# Altium PCB usb_plug.PCBDOC
Units mil, origin at the board's own origin, x right, y up, seen from the top; angles counter-clockwise.
Board outline 1930 x 850 mil, 2 copper layers (Top Layer, Bottom Layer); 13 components, 15 nets, 59 pads, 0 vias.
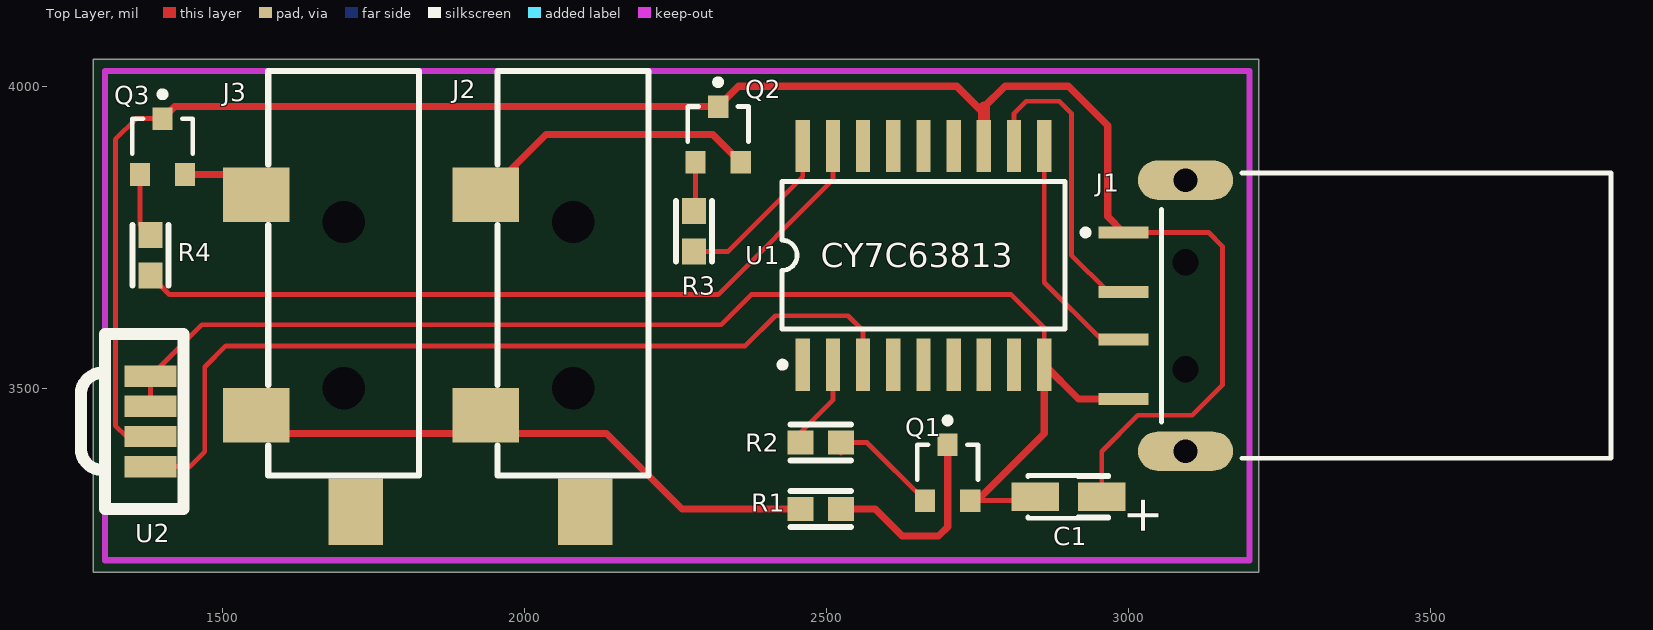
[diagram p0: Top Layer view]
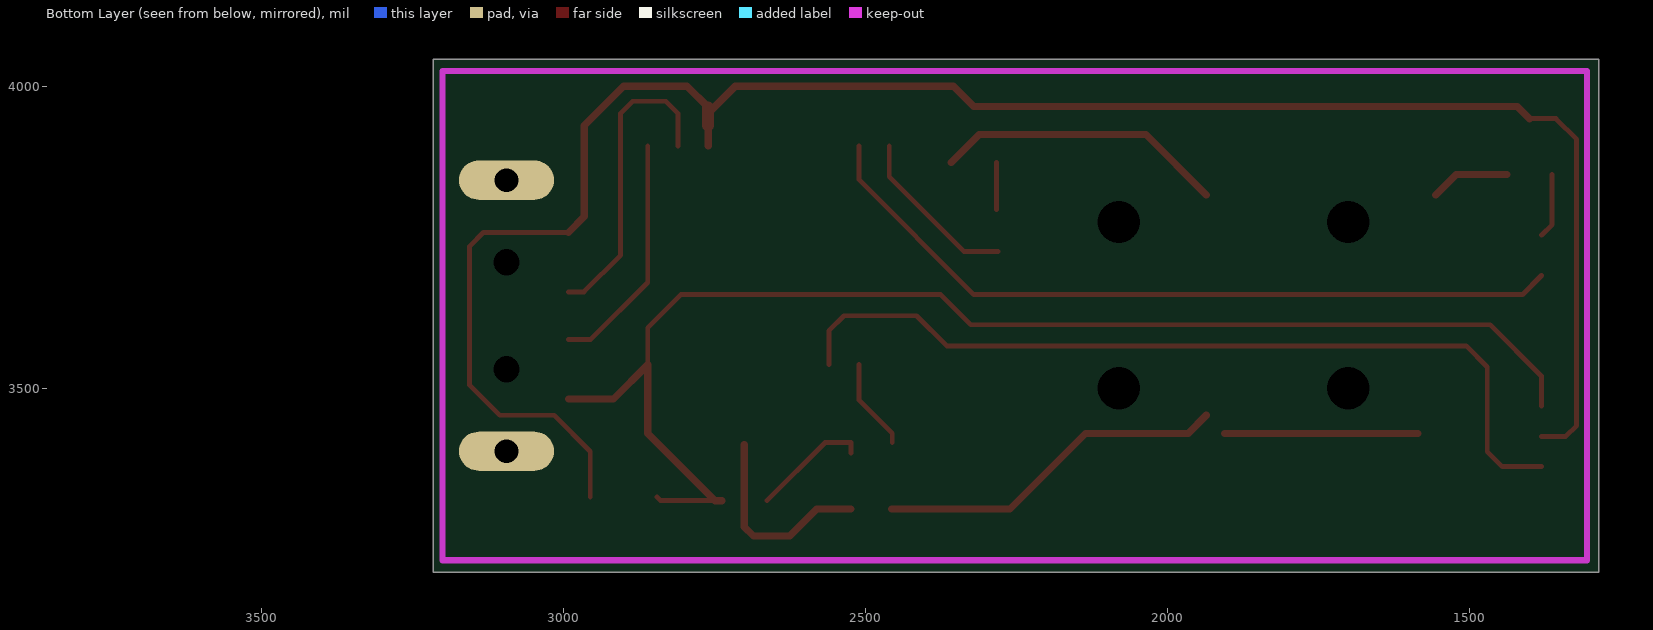
[diagram p1: Bottom Layer view, seen from below]

## Layer stack, top to bottom
Top Layer: signal copper 1.4
Dielectric: dielectric 12.6, FR-4, Dk 4.8
Bottom Layer: signal copper 1.4

## Board outline
1290,4045 3215,4045 3215,3195 1285,3195 1285,4045

## Design rules (kind name [scope] priority, off if disabled: settings)
Clearance [All] p1: gap=8
ComponentClearance [All] p1: gap=10 collisioncheckmode=2 verticalgap=10
PolygonConnect [All] p1: connectstyle=Relief reliefconductorwidth=10 reliefentries=4 polygonreliefangle="90 Angle"
RoomDefinition usb_plug [InComponentClass('usb_plug')] p1 off: confinementstyle=ConfineIn formatcopy=TRUE lockcomponents=FALSE outline 0,0 2000,0 2000,1000 0,1000
RoutingVias [All] p1: holewidth=25 width=40 viastyle="Through Hole" minholewidth=28 minwidth=50 maxholewidth=28 maxwidth=50
SolderMaskExpansion [All] p1: expansion=4
TestPointUsage [All] p1: valid=0 allowmultiple=FALSE
Testpoint [All] p1: side=15 testpointundercomponent=TRUE minsize=40 maxsize=100 preferedsize=60 minholesize=0 maxholesize=40 preferedholesize=32 testpointgrid=1 style=1023 order=0-112345678
Width [All] p1: maxlimit=20 minlimit=8 preferedwidth=8
17 further rules are at their usual default settings.

## Components (designator, comment, footprint, x,y, rotation, side; value= is the part's Value field where it differs from the comment)
C1 "Cap Pol1" TC3216-1206 2900,3320 r180 top
J1 "1-1470168-1" 1470695 3200,3620 r0 top
J2 "3.5mm phono plug" "CUI MJ-3523-SMT" 2080,3500 r90 top
J3 "3.5mm phono plug" "CUI MJ-3523-SMT" 1700,3500 r90 top
Q1 "NPN" SO-G3/D4.1 2700,3360 r0 top
Q2 "NPN" SO-G3/D4.1 2320,3920 r0 top
Q3 "NPN" SO-G3/D4.1 1400,3900 r0 top
R1 "50ohm" CR1608-0603 2490,3300 r180 top
R2 "Res2" CR1608-0603 2490,3410 r0 top
R3 "Res2" CR1608-0603 2280,3760 r90 top
R4 "Res2" CR1608-0603 1380,3720 r90 top
U1 "CY7C63813-SXC" SO-G18/E6.2 2660,3720 r0 top
U2 "TSOP362XX" "TSOP 362XX" 1380,3520 r270 top

## Footprints (in the part's own frame and the unit in brackets; to place one, negate y for a bottom-side part, rotate by r counter-clockwise, add the part's x,y. Pads: shape width x height; smd on the part's side, far side on the other; paste and mask are expansions set on the pad)
1470695 [mm] "Connector; USB1.1, Type A, SM; 4 Position; Right Angle"
  rect 2.1x0.5 smd: 1(-5.3,3.5) 2(-5.3,1) 3(-5.3,-1) 4(-5.3,-3.5)
  oval 4x1.65 hole 1: 5(-2.7,-5.7) 6(-2.7,5.7)
  round 0.8 hole 1.1 unplated: MH1(-2.7,-2.25) MH2(-2.7,2.25)
  silkscreen extent -7.02,-6 15.2,6
CR1608-0603 [mm] "Chip Resistor; Body 1.6 x 0.8 mm (LxW typ)"
  rect 1.1x1 smd: 1(-0.85,0) 2(0.85,0)
"CUI MJ-3523-SMT" [mil] "CUI 3.5mm phono jack, surface mount"
  round 20 hole 70 unplated: 0(0,0) 0(275,0)
  rect 90x110 smd: 1(320,145) 2(-45,145)
  rect 110x90 smd: 3(-205,-20)
  silkscreen extent -145,-125 525,125
SO-G3/D4.1 [mm] "SOT-23; 3 Leads; Body 3.0 x 2.5 mm, inc. leads (LxW max), Alternate Lead Configuration"
  rect 0.85x0.95 smd: 1(0,1.175) 2(-0.95,-1.175) 3(0.95,-1.175)
  silkscreen extent -1.27,-0.3 1.28,2.32
SO-G18/E6.2 [mm] "Small Outline; 18 Leads; Body Width 7.5 mm; Pitch 1.27 mm"
  rect 0.6x2.2 smd: 1(-5.08,-4.6) 2(-3.81,-4.6) 3(-2.54,-4.6) 4(-1.27,-4.6) 5(0,-4.6) 6(1.27,-4.6) 7(2.54,-4.6) 8(3.81,-4.6) 9(5.08,-4.6) 10(5.08,4.6) 11(3.81,4.6) 12(2.54,4.6) 13(1.27,4.6) 14(0,4.6) 15(-1.27,4.6) 16(-2.54,4.6) 17(-3.81,4.6) 18(-5.08,4.6)
  silkscreen extent -6.05,-4.72 5.95,3.1
TC3216-1206 [mm] "Capacitor, SM Tantalum; Body 3.2 x 1.6 mm (LxW typ)"
  rect 2x1.2 smd: 1(-1.4,0) 2(1.4,0)
  silkscreen extent -1.7,-0.9 1.7,0.9
"TSOP 362XX" [mm] "SMT IR receiver module"
  rect 0.9x2.2 smd: 1(0,0) 2(1.27,0) 3(2.54,0) 4(3.81,0)
  silkscreen extent -1.78,-2.93 5.59,1.4

## Part data
C1: "Polarized Capacitor (Radial)"
J1: "USB 1.1, Right Angle, Thru-Hole, A Type, Receptacle, 4x4 Position, Stacked, Black"
J2 J3: library part Phonejack2, "Jack Socket, 1/4\" [6.5mm], Thru-Hole, Vertical, 2-Conductor Open Circuit"
Q1 Q2 Q3: "NPN Bipolar Transistor"
R1: library part "Res Semi", "Semiconductor Resistor"
R2 R3 R4: "Resistor"
U1: "USB microcontroller, SMT"
U2: library part TSOP36238

## Nets (pads, with @x,y where several pads share a name; then routed paths per layer and width w, separated by ;. In a path a pad name is that pad's centre, name@x,y a point inside that pad or via, vN(x,y) a via of type N, cw(c..) or ccw(c..) an arc to the next point about the centre after c; other vN are vias at no path point)
GND: C1.2 J1.4 Q1.3 U1.9 U2.1 U2.2 | length 2217.3
  Top Layer w8: U2.2 U2.1 1465,3605 2325,3605 2375,3655 2805,3655 2860,3600 U1.9 ; Q1.3 2838.62,3313.74 C1.2
  Top Layer w12: Q1.3 2748.74,3313.74 2860,3425 U1.9 2916.69,3482.2 J1.4
NetJ1_2: J1.2 U1.11 | length 511.9
  Top Layer w8: U1.11 2810,3955 2830,3975 2885,3975 2905,3955 2905,3720 2965.63,3659.37 J1.2
NetJ1_3: J1.3 U1.10 | length 396.5
  Top Layer w8: U1.10 2860,3675 2954.37,3580.63 J1.3
NetJ2_1: J2.1 Q2.3 | length 483
  Top Layer w12: J2.1 2035,3920 2311.14,3920 Q2.3
NetJ2_5: J2.2 J3.2 R1.2 | length 905.7
  Top Layer w12: J3.2@1585,3425 J2.2@1905,3425 ; J2.2 1965,3425 2135,3425 2260,3300 R1.2
NetJ3_1: J3.1 Q3.3 | length 131.6
  Top Layer w12: Q3.3 1521.26,3853.74 J3.1
NetQ1_1: Q1.1 R1.1 | length 337.6
  Top Layer w12: R1.1 2580,3300 2625,3255 2685,3255 2700,3270 Q1.1
NetQ1_2: Q1.2 R2.2 | length 196.1
  Top Layer w8: R2.2@2523.46,3392.87 R2.2 2566.34,3410 Q1.2
NetQ2_2: Q2.2 R3.2 | length 77.7
  Top Layer w8: R3.2@2282.6,3796.06 Q2.2
NetQ3_2: Q3.2 R4.2 | length 107.5
  Top Layer w8: Q3.2 1362.6,3770.87 R4.2
NetR2_1: R2.1 U1.2 | length 151.7
  Top Layer w8: R2.1@2455,3410 2455,3425 2510,3480 U1.2
NetR3_1: R3.1 U1.18 | length 282.2
  Top Layer w8: R3.1 2336.54,3726.54 2460,3850 U1.18
NetR4_1: R4.1 U1.17 | length 1277.9
  Top Layer w8: R4.1 1411.54,3655 2320,3655 2510,3845 U1.17
NetU1_3: U1.3 U2.4 | length 1432
  Top Layer w8: U2.4 1445,3370 1470,3395 1470,3535 1505,3570 2365,3570 2415,3620 2535,3620 2560,3595 U1.3
VCC: C1.1 J1.1 Q2.1 Q3.1 U1.12 U2.3 | length 3264.6
  Top Layer w8: U2.3 1340,3420 1322,3438 1322,3912 1356.26,3946.26 Q3.1 ; C1.1 2955.12,3395.12 3015,3455 3105,3455 3155,3505 3155,3735 3132.2,3757.8 J1.1
  Top Layer w12: Q3.1 1420,3966.26 Q2.1 2353.74,4000 2715,4000 2760,3955 2760,3965 2795,4000 2900,4000 2965,3935 2965,3784.13 J1.1 ; U1.12 U1.12@2760,3935
  Top Layer w20: U1.12@2760,3935 2760,3965
pads on no net: J1.5 J1.6 J1.MH1 J1.MH2 J2.0 J2.3 J3.0 J3.3 U1.1 U1.4 U1.5 U1.6 U1.7 U1.8 U1.13 U1.14 U1.15 U1.16

## Keep-outs
Keep-Out Layer:
  lines w10: 1305,3215 3200,3215 3200,4025 1305,4025 1305,3215

## Silkscreen, mask and mechanical layers (free items; w line width, h text height)
Top Overlay:
  lines w10: 1350,3670 1350,3770 ; 1410,3670 1410,3770 ; 2250,3710 2250,3810 ; 2310,3710 2310,3810 ; 2440,3270 2540,3270 ; 2440,3330 2540,3330 ; 2440,3380 2540,3380 ; 2440,3440 2540,3440
  text "CY7C63813" at 2490,3700 h40
  text "+" at 3050,3255 h60 r90

## Text inside footprints (layer, text, board x,y; h text height)
J1: Mechanical 1 "Mech 2 - Clearance, move to internal plane if present" at 3160.63,3882.84 h11.81; Mechanical 1 "Mech 1 - Slot cut-out" at 3160.63,3902.52 h11.81; Mechanical 1 "Assign keep-out area to slot" at 3160.63,3961.58 h11.81; Mechanical 1 "Slot 1x2.5mm, PTH" at 3160.63,3922.21 h11.81; Mechanical 1 "Alert PCB fab to slot details" at 3160.63,3941.89 h11.81; Mechanical 1 "PCB Edge" at 3218.6,3416.35 h9.84 r90